# Altium PCB PCB2.PcbDoc
Units mm, origin at the board's own origin, x right, y up, seen from the top; angles counter-clockwise.
Board outline 62 x 95 mm, 2 copper layers (Top Layer, Bottom Layer); 15 components, 30 nets, 99 pads, 0 vias.
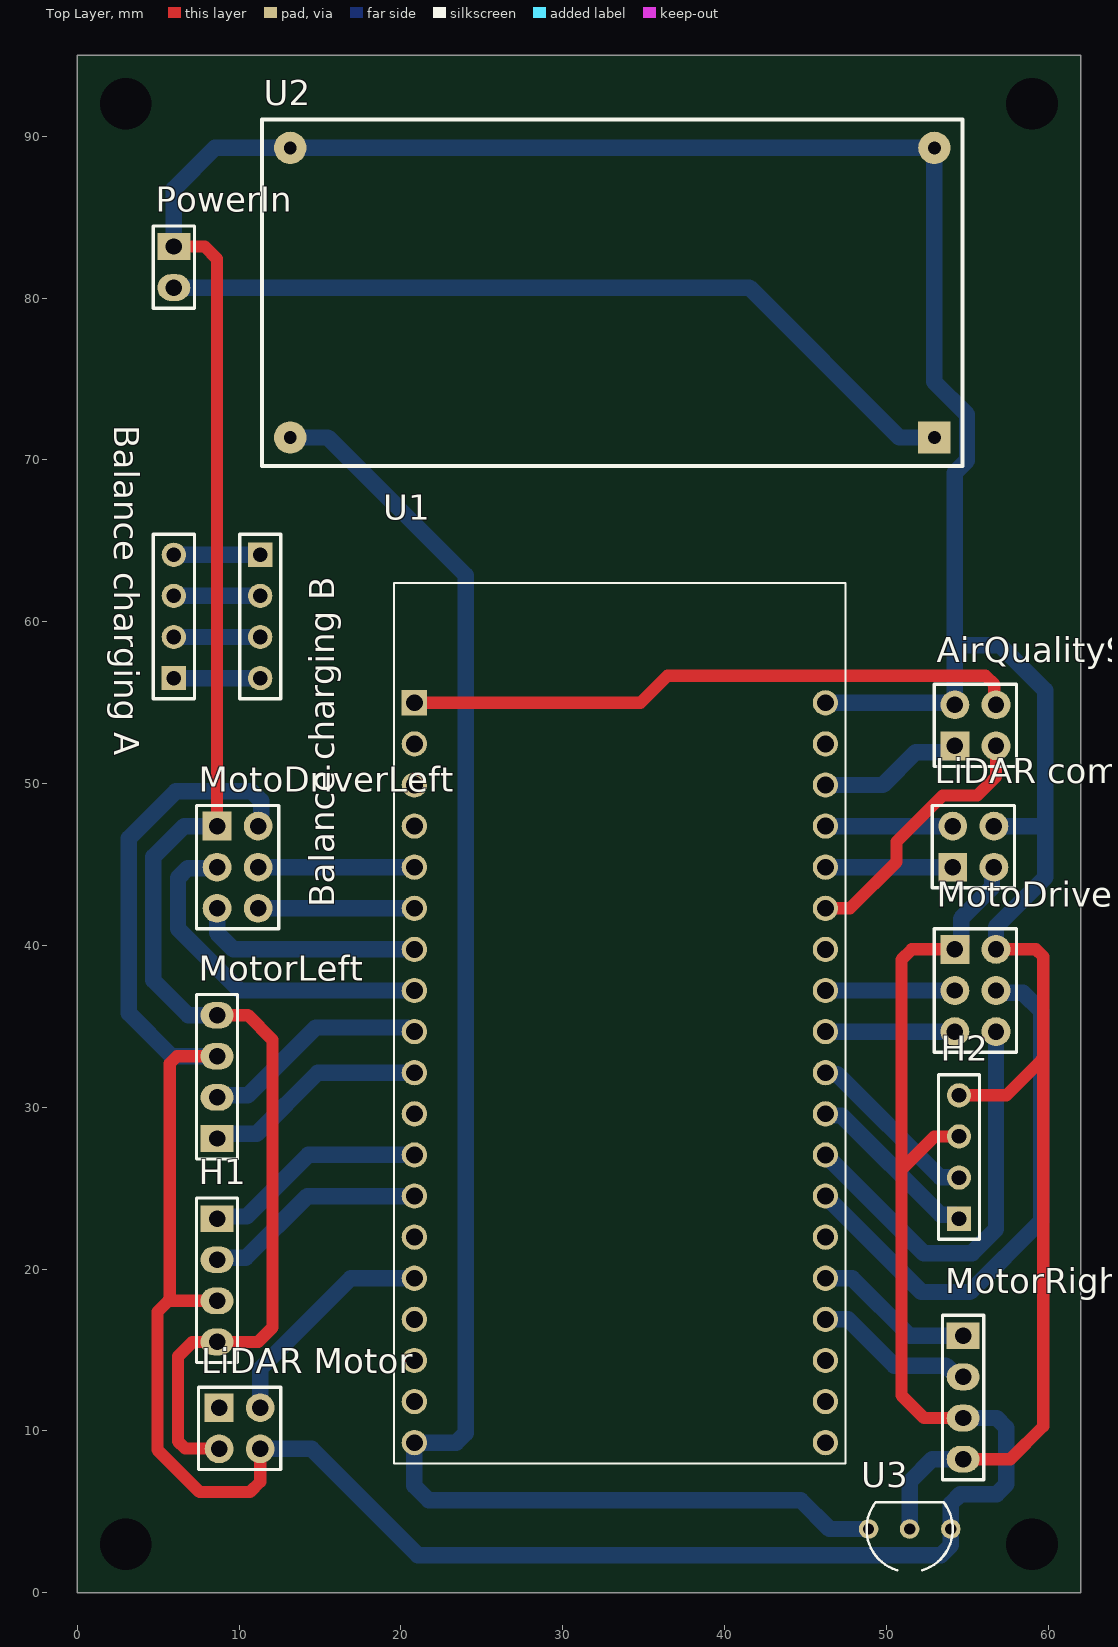
[diagram p0: Top Layer view]
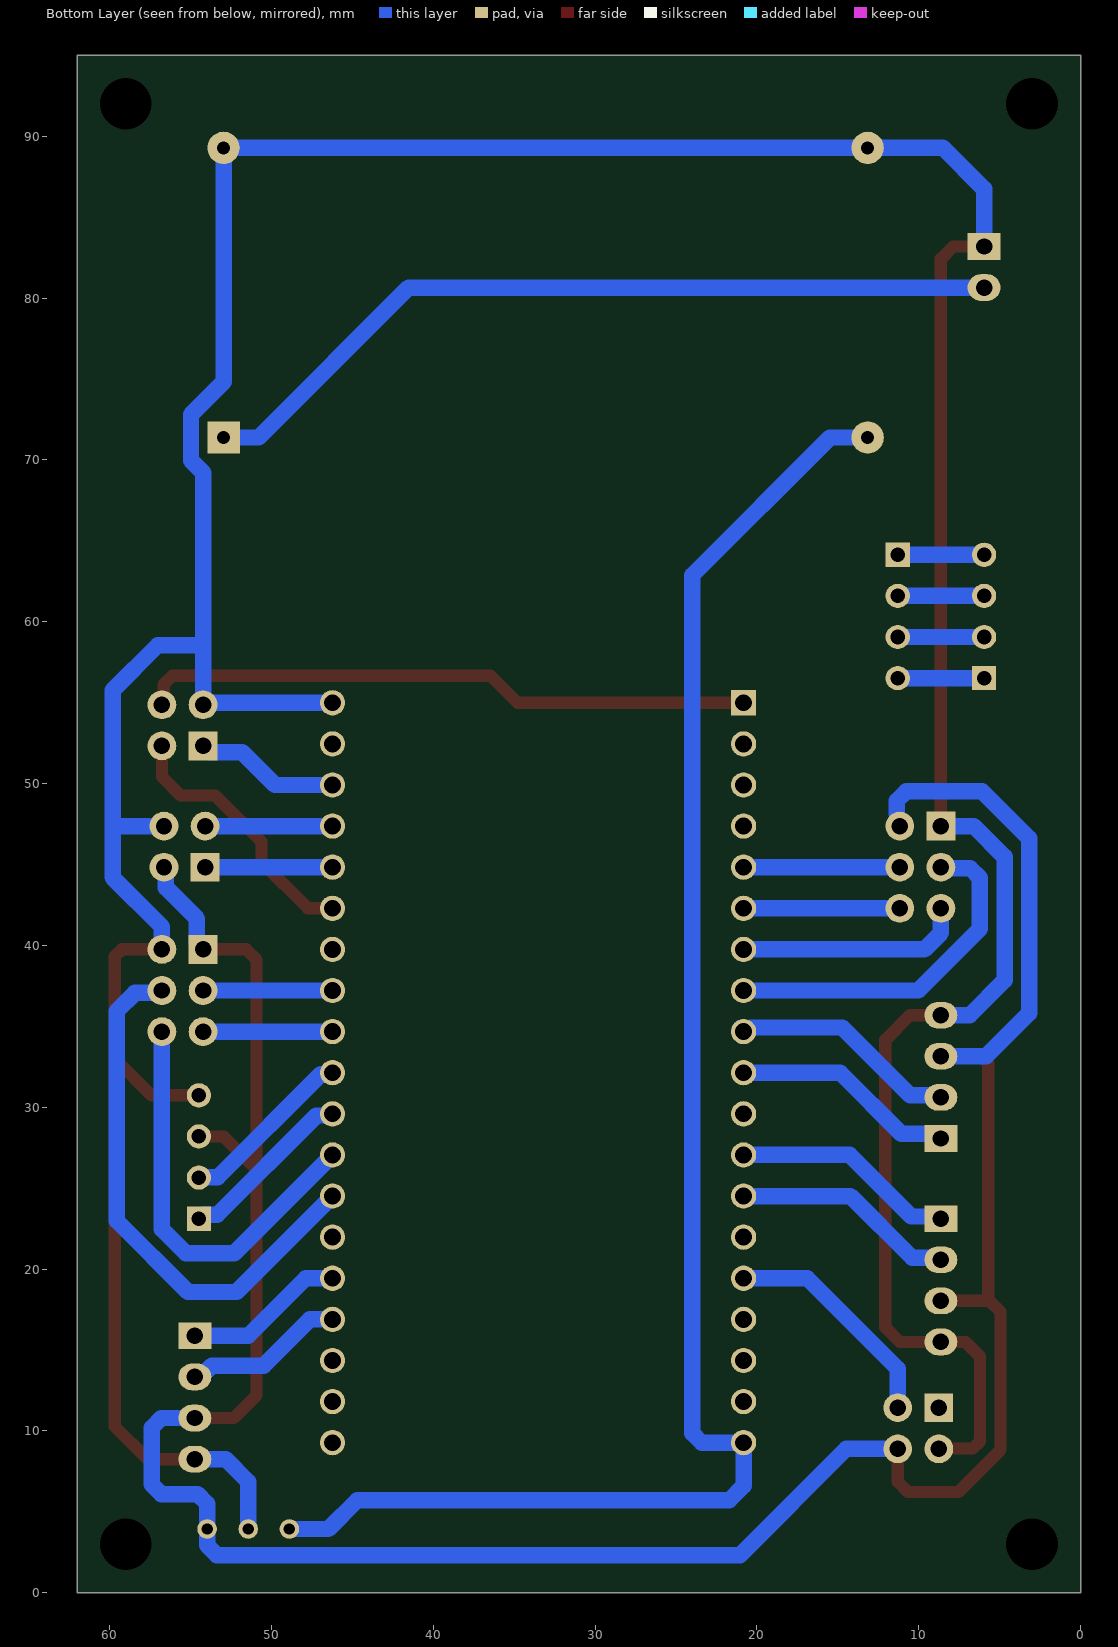
[diagram p1: Bottom Layer view, seen from below]

## Layer stack, top to bottom
Top Solder: solder mask 0.0102, Solder Resist, Dk 3.5
Top Layer: signal copper 0.0356
Dielectric 1: dielectric 0.32, FR-4, Dk 4.8
Bottom Layer: signal copper 0.0356
Bottom Solder: solder mask 0.0102, Solder Resist, Dk 3.5

## Board outline
0,0 0,95 62,95 62,0

## Design rules (kind name [scope] priority, off if disabled: settings)
Clearance [All] p1: gap=0.508 ignorepadtopadclearanceinfootprint=FALSE
PolygonConnect [All] p1: connectstyle=Relief reliefconductorwidth=0.254 reliefentries=4 polygonreliefangle="90 Angle" airgapwidth=0.254
RoomDefinition component_layout [InComponentClass('component_layout')] p1: confinementstyle=ConfineIn formatcopy=TRUE lockcomponents=FALSE outline 139.319,1.016 321.818,1.016 321.818,77.851 139.319,77.851
RoutingVias [All] p1: holewidth=0.711 width=1.27 viastyle="Through Hole" minholewidth=0.711 minwidth=1.27 maxholewidth=0.711 maxwidth=1.27
SolderMaskExpansion [All] p1: expansion=0.102 istentingtop=FALSE
Width [All] p1: maxlimit=1.27 minlimit=0.762 preferedwidth=1.016 toplayer_maxwidth=0.762 toplayer_prefwidth=0.762 minimp=50.000000 maximp=50.000000 favimp=50.000000
30 further rules are at their usual default settings.

## Components (designator, comment, footprint, x,y, rotation, side; value= is the part's Value field where it differs from the comment)
AirQualitySensor "HEADER" HDR2X2 54.229,52.324 r0 top
"Balance charging A" "Header 4" HDR1X4#1 5.969,56.515 r90 top
"Balance charging B" "Header 4" HDR1X4#1 11.303,64.135 r270 top
H1 "Header 4" HDR1X4#2 8.636,23.114 r270 top
H2 "Header 4" HDR1X4#1 54.483,23.114 r90 top
"LiDAR comp." "HEADER" HDR2X2 54.102,44.831 r0 top
"LiDAR Motor" "HEADER" HDR2X2 8.763,11.43 r270 top
MotoDriverLeft "HEADER" HDR2X3 8.636,47.371 r270 top
MotoDriverRight "HEADER" HDR2X3 54.229,39.751 r270 top
MotorLeft "Header 4" HDR1X4#2 8.636,28.067 r90 top
MotorRight "Header 4" HDR1X4#2 54.737,15.875 r270 top
PowerIn "Header 2" HDR1X2 5.969,83.185 r270 top
U1 "ESP32-DEVKITC-32D" MODULE_ESP32-DEVKITC-32D 33.528,35.231 r0 top
U2 "Buck Converter" "Buck Converter" 54.709,91.031 r180 top
U3 "78L05ACZ" TO-92 51.435,3.937 r180 top

## Footprints (in the part's own frame and the unit in brackets; to place one, negate y for a bottom-side part, rotate by r counter-clockwise, add the part's x,y. Pads: shape width x height; smd on the part's side, far side on the other; paste and mask are expansions set on the pad)
"Buck Converter" [mm] "Buck Converter"
  rect 2x2 hole 0.8: 1(1.75,19.65)
  round 2 hole 0.8: 2(1.75,1.75) 3(41.55,1.75) 4(41.55,19.65)
  silkscreen extent 0,0 43.3,21.4
HDR1X2 [mil]
  rect 65x80 hole 40: 1(0,0)
  oval 65x80 hole 40: 2(100,0)
  silkscreen extent -50,-50 150,50
HDR1X4#1 [mm] "Connector; Header; 4 Position"
  rect 1.5x1.5 hole 0.9: 1(0,0)
  round 1.5 hole 0.9: 2(2.54,0) 3(5.08,0) 4(7.62,0)
  silkscreen extent -1.27,-1.27 8.89,1.27
HDR1X4#2 [mm]
  rect 1.651x2.032 hole 1.016: 1(0,0)
  oval 1.651x2.032 hole 1.016: 2(2.54,0) 3(5.08,0) 4(7.62,0)
  silkscreen extent -1.27,-1.27 8.89,1.27
HDR2X2 [mil] "Connector; Header; 5x2 Position"
  rect 70x70 hole 40: 1(0,0)
  round 70 hole 40: 2(0,100) 3(100,0) 4(100,100)
  silkscreen extent -50,-50 150,150
HDR2X3 [mil] "Connector; Header; 5x2 Position"
  rect 70x70 hole 40: 1(0,0)
  round 70 hole 40: 2(0,100) 3(100,0) 4(100,100) 5(200,0) 6(200,100)
  silkscreen extent -50,-50 250,150
MODULE_ESP32-DEVKITC-32D [mm]
  rect 1.56x1.56 / inner round 1.56 / far side rect 1.56x1.56 hole 1.04: 1(-12.7,19.76)
  round 1.56 hole 1.04: 2(-12.7,17.22) 3(-12.7,14.68) 4(-12.7,12.14) 5(-12.7,9.6) 6(-12.7,7.06) 7(-12.7,4.52) 8(-12.7,1.98) 9(-12.7,-0.56) 10(-12.7,-3.1) 11(-12.7,-5.64) 12(-12.7,-8.18) 13(-12.7,-10.72) 14(-12.7,-13.26) 15(-12.7,-15.8) 16(-12.7,-18.34) 17(-12.7,-20.88) 18(-12.7,-23.42) 19(-12.7,-25.96) 20(12.7,19.76) 21(12.7,17.22) 22(12.7,14.68) 23(12.7,12.14) 24(12.7,9.6) 25(12.7,7.06) 26(12.7,4.52) 27(12.7,1.98) 28(12.7,-0.56) 29(12.7,-3.1) 30(12.7,-5.64) 31(12.7,-8.18) 32(12.7,-10.72) 33(12.7,-13.26) 34(12.7,-15.8) 35(12.7,-18.34) 36(12.7,-20.88) 37(12.7,-23.42) 38(12.7,-25.96)
  silkscreen extent -13.95,-27.25 13.95,27.15, body extent -13.97,-24.8 13.97,30.3, height 3.25
TO-92 [mm]
  round 1.208 hole 0.7: 1(-2.54,0) 2(0,0) 3(2.54,0)
  silkscreen extent -2.66,-1.65 2.66,2.55, body extent -2.41,-1.84 2.41,1.84, height 5.34

## Part data
AirQualitySensor "LiDAR comp." "LiDAR Motor": library part "Header 2x2", "Header, 5-Pin, Dual row", Publisher="Altium Limited", Revision="17-Jul-2002: Re-released for DXP Platform."
"Balance charging A" "Balance charging B" MotorLeft MotorRight: "Header, 4-Pin", LatestRevisionDate=17-Jul-2002, LatestRevisionNote="Re-released for DXP Platform.", Publisher="Altium Limited"
H1 H2: "Header, 4-Pin", Manufacturer="Generic Components", Class=Connector
MotoDriverLeft MotoDriverRight: library part "Header 2x3", "Header, 5-Pin, Dual row", Publisher="Altium Limited", Revision="17-Jul-2002: Re-released for DXP Platform."
PowerIn: "Header, 2-Pin", Manufacturer="Generic Components", Class=Connector
U1: "WiFi Development Tools (802.11) ESP32 General Development Kit, ESP32-WROOM-32D on the board", Package=None, Availability="In Stock", Check_prices=https://www.snapeda.com/parts/ESP32-DEVKITC-32D/Espressif+Systems/view-part/?ref=eda, MF="Espressif Systems", MP=ESP32-DEVKITC-32D, Price=None, Purchase-URL=https://pricing.snapeda.com/search/part/ESP32-DEVKITC-32D/?ref=eda, SnapEDA_Link=https://www.snapeda.com/parts/ESP32-DEVKITC-32D/Espressif+Systems/view-part/?ref=snap
U2: "Buck Convertor"
U3: "Linear Voltage Regulator IC Positive Fixed 1 Output 100mA TO-92-3", Package="TO-92 ON", Availability="In Stock", Check_prices=https://www.snapeda.com/parts/78L05ACZ/STMicroelectronics/view-part/?ref=eda, MF=STMicroelectronics, MP=78L05ACZ, Price=None, Purchase-URL=https://pricing.snapeda.com/search/part/78L05ACZ/?ref=eda, SnapEDA_Link=https://www.snapeda.com/parts/78L05ACZ/STMicroelectronics/view-part/?ref=snap

## Free pads (board coordinates)
  round 1.524 hole 3.2: 1(3,92) 2(59,92) 3(3,3) 4(59,3)

## Nets (pads, with @x,y where several pads share a name; then routed paths per layer and width w, separated by ;. In a path a pad name is that pad's centre, name@x,y a point inside that pad or via, vN(x,y) a via of type N, cw(c..) or ccw(c..) an arc to the next point about the centre after c; other vN are vias at no path point)
+3V3: AirQualitySensor.4 U1.1 | length 38
  Top Layer w0.762: U1.1 34.798,54.991 36.467,56.66 56.116,56.66 56.666,56.11 56.666,54.967 AirQualitySensor.4
+5: "LiDAR comp..3" "LiDAR Motor.4" H1.3 H2.3 MotoDriverLeft.2 MotoDriverRight.1 MotorLeft.3 MotorRight.3 U3.1 | length 173.3
  Top Layer w0.762: 5.625,18.034 H1.3 ; MotorLeft.3 6.161,33.147 5.715,32.701 5.715,18.124 4.953,17.362 4.953,8.828 7.558,6.223 10.668,6.223 11.303,6.858 11.303,8.89 ; H2.3 52.959,28.194 50.927,26.162 ; MotorRight.3 52.324,10.795 50.927,12.192 50.927,26.162 ; MotoDriverRight.1@54.763,40.259 54.737,40.259 MotoDriverRight.1 51.562,39.751 50.927,39.116 50.927,26.162
  Bottom Layer w1.016: MotorLeft.3 5.842,33.147 3.175,35.814 3.175,46.609 6.096,49.53 10.764,49.53 11.359,48.935 11.359,48.093 11.322,48.056 11.322,47.517 MotoDriverLeft.2 ; 11.303,8.89 14.478,8.89 21.051,2.317 53.371,2.317 53.975,2.921 53.975,5.501 54.57,6.096 56.809,6.096 57.404,6.691 57.404,10.2 56.809,10.795 MotorRight.3 ; MotoDriverRight.1 54.61,40.132 54.61,41.656 56.523,43.569 56.523,44.712 56.642,44.831
+12: U1.19 U2.4 U3.3 | length 102.6
  Bottom Layer w1.016: U2.4 15.487,71.381 24.003,62.865 24.003,9.866 23.408,9.271 U1.19 20.828,6.604 21.717,5.715 44.704,5.715 46.482,3.937 U3.3
Echo1: H1.2 U1.13 | length 13.8
  Bottom Layer w1.016: H1.2 8.758,20.696 10.409,20.696 14.224,24.511 U1.13
Echo2: H2.2 U1.29 | length 10.9
  Bottom Layer w1.016: U1.29 46.332,32.027 46.967,32.027 53.32,25.674 54.463,25.674 H2.2
GND: "LiDAR comp..4" "LiDAR Motor.3" AirQualitySensor.2 H1.4 H2.4 MotoDriverLeft.1 MotoDriverRight.2 MotorLeft.4 MotorRight.4 PowerIn.1 U1.20 U2.2 U2.3 U3.2 | length 264.7
  Top Layer w0.762: PowerIn.1 7.874,83.185 8.636,82.423 MotoDriverLeft.1 ; MotorLeft.4 10.541,35.687 12.065,34.163 12.065,16.383 11.176,15.494 H1.4 7.112,15.494 6.223,14.605 6.223,9.354 6.669,8.908 8.745,8.908 8.763,8.89 ; H2.4 57.404,30.734 59.563,32.893 59.69,32.893 ; MotorRight.4 57.658,8.255 59.69,10.287 59.69,32.893 ; MotoDriverRight.2 59.244,39.751 59.69,39.305 59.69,32.893
  Bottom Layer w1.016: PowerIn.1 5.969,86.741 8.509,89.281 U2.3 U2.2 52.959,74.818 54.975,72.802 54.975,69.96 54.229,69.214 54.229,58.547 ; H1.4@8.617,15.494 H1.4 ; MotorLeft.4 6.858,35.687 4.699,37.846 4.699,45.466 6.604,47.371 MotoDriverLeft.1 ; U1.20 AirQualitySensor.2@54.102,54.991 ; U3.2 51.435,6.858 52.832,8.255 MotorRight.4 ; AirQualitySensor.2 54.229,58.547 ; 56.642,47.371 59.817,47.371 ; MotoDriverRight.2 56.769,41.148 59.817,44.196 59.817,47.371 ; 54.229,58.547 57.023,58.547 59.817,55.753 59.817,47.371
Left_motor_1: MotoDriverLeft.3 U1.8 | length 22
  Bottom Layer w1.016: MotoDriverLeft.3 8.565,44.76 6.818,44.76 6.223,44.165 6.223,41.025 10.037,37.211 U1.8
Left_motor_2: MotoDriverLeft.5 U1.7 | length 14.1
  Bottom Layer w1.016: MotoDriverLeft.5 8.636,40.767 9.652,39.751 U1.7
LeftEncoder1: MotorLeft.1 U1.10 | length 13.9
  Bottom Layer w1.016: MotorLeft.1 8.92,28.351 11.079,28.351 14.859,32.131 U1.10
LeftEncoder2: MotorLeft.2 U1.9 | length 14.1
  Bottom Layer w1.016: MotorLeft.2 8.758,30.729 10.536,30.729 14.732,34.925 20.427,34.925 20.681,34.671 U1.9
LME1: MotoDriverLeft.4 U1.5 | length 9.7
  Bottom Layer w1.016: MotoDriverLeft.4 U1.5
LME2: MotoDriverLeft.6 U1.6 | length 9.7
  Bottom Layer w1.016: MotoDriverLeft.6 U1.6
motor_PWM_lidar: "LiDAR Motor.2" U1.15 | length 14.3
  Bottom Layer w1.016: 11.303,11.43 11.303,13.843 16.891,19.431 U1.15
"NetBalance charging A_1": "Balance charging A.1" "Balance charging B.4" | length 5.3
  Bottom Layer w1.016: 5.969,56.515 11.303,56.515
"NetBalance charging A_2": "Balance charging A.2" "Balance charging B.3" | length 5.3
  Bottom Layer w1.016: 5.969,59.055 11.303,59.055
"NetBalance charging A_3": "Balance charging A.3" "Balance charging B.2" | length 5.3
  Bottom Layer w1.016: 5.969,61.595 11.303,61.595
"NetBalance charging A_4": "Balance charging A.4" "Balance charging B.1" | length 5.3
  Bottom Layer w1.016: 5.969,64.135 11.303,64.135
NetPowerIn_2: PowerIn.2 U2.1 | length 50.8
  Bottom Layer w1.016: PowerIn.2 41.529,80.645 50.793,71.381 U2.1
Right_motor_1: MotoDriverRight.3 U1.27 | length 8
  Bottom Layer w1.016: U1.27 MotoDriverRight.3
Right_motor_2: MotoDriverRight.5 U1.28 | length 8
  Bottom Layer w1.016: U1.28 MotoDriverRight.5
RightEncoder1: MotorRight.1 U1.34 | length 10
  Bottom Layer w1.016: U1.34 47.879,19.431 51.435,15.875 MotorRight.1
RightEncoder2: MotorRight.2 U1.35 | length 10
  Bottom Layer w1.016: U1.35 47.625,16.891 50.482,14.034 53.676,14.034 54.375,13.335 MotorRight.2
RME1: MotoDriverRight.4 U1.32 | length 33.9
  Bottom Layer w1.016: U1.32 52.157,18.582 55.158,18.582 59.563,22.987 59.563,35.941 58.439,37.065 56.915,37.065 MotoDriverRight.4
RME2: MotoDriverRight.6 U1.31 | length 25.9
  Bottom Layer w1.016: U1.31 47.744,25.535 52.292,20.987 55.293,20.987 56.769,22.463 MotoDriverRight.6
Rx-LiDAR: "LiDAR comp..2" U1.23 | length 7.9
  Bottom Layer w1.016: U1.23 54.102,47.371
SCL_airqual: AirQualitySensor.1 U1.22 | length 9
  Bottom Layer w1.016: U1.22 49.784,49.911 51.816,51.943 53.848,51.943 AirQualitySensor.1
SDA_airqual: AirQualitySensor.3 U1.25 | length 16.5
  Top Layer w0.762: U1.25 47.752,42.291 50.616,45.155 50.616,46.399 53.48,49.263 55.613,49.263 56.769,50.419 AirQualitySensor.3
Trig1: H1.1 U1.12 | length 13.8
  Bottom Layer w1.016: H1.1 8.768,23.246 10.469,23.246 14.274,27.051 U1.12
Trig2: H2.1 U1.30 | length 10.9
  Bottom Layer w1.016: U1.30 46.332,29.487 47.221,29.487 53.352,23.356 54.241,23.356 H2.1
Tx-LiDAR: "LiDAR comp..1" U1.24 | length 7.9
  Bottom Layer w1.016: U1.24 54.102,44.831
pads on no net: "LiDAR Motor.1" U1.2 U1.3 U1.4 U1.11 U1.14 U1.16 U1.17 U1.18 U1.21 U1.26 U1.33 U1.36 U1.37 U1.38
copper on no net: | length 0.3
  Bottom Layer w1.016: 8.381,18.034 8.636,18.034